# Altium PCB PCB_Modulo_22.PcbDoc
Units mm, origin at the board's own origin, x right, y up, seen from the top; angles counter-clockwise.
Board outline 80.01 x 60 mm, 2 copper layers (Top Layer, Bottom Layer); 30 components, 26 nets, 104 pads, 124 vias.
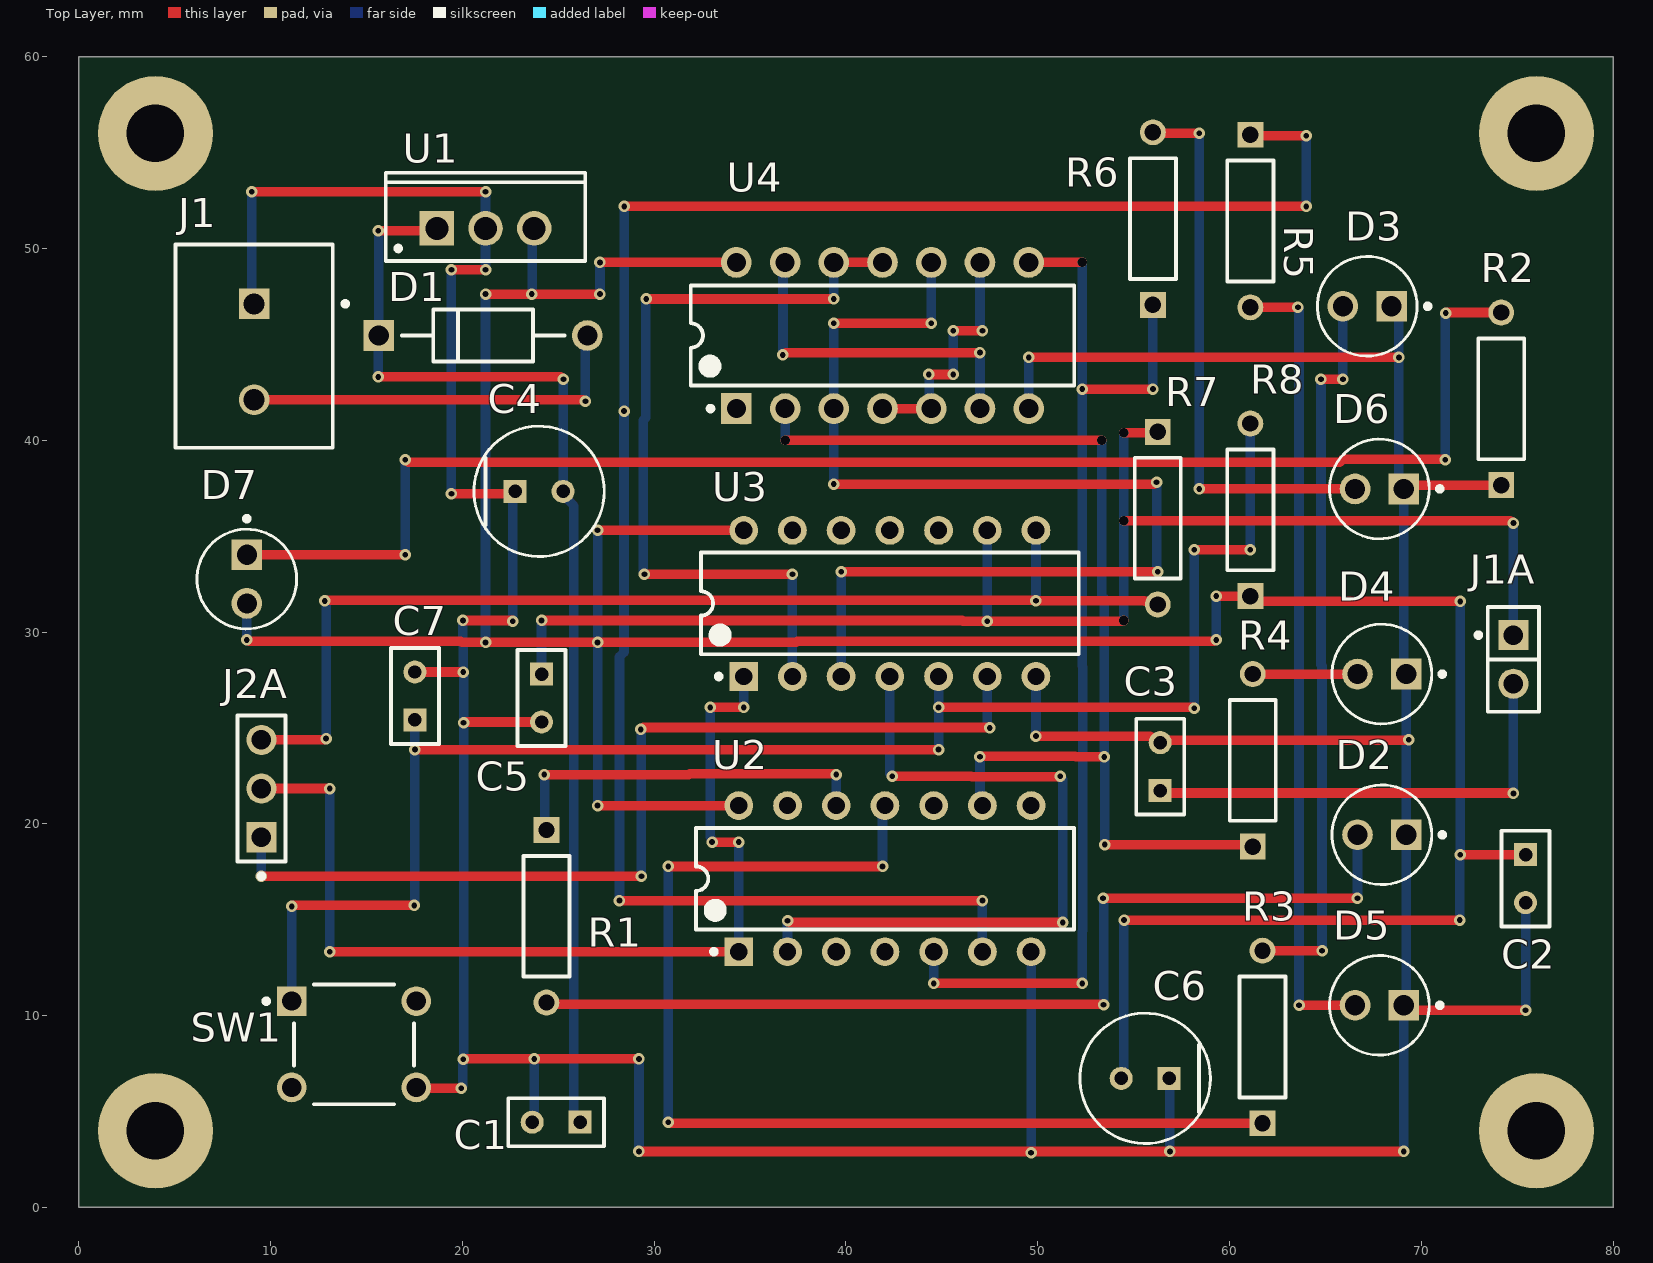
[diagram p0: Top Layer view]
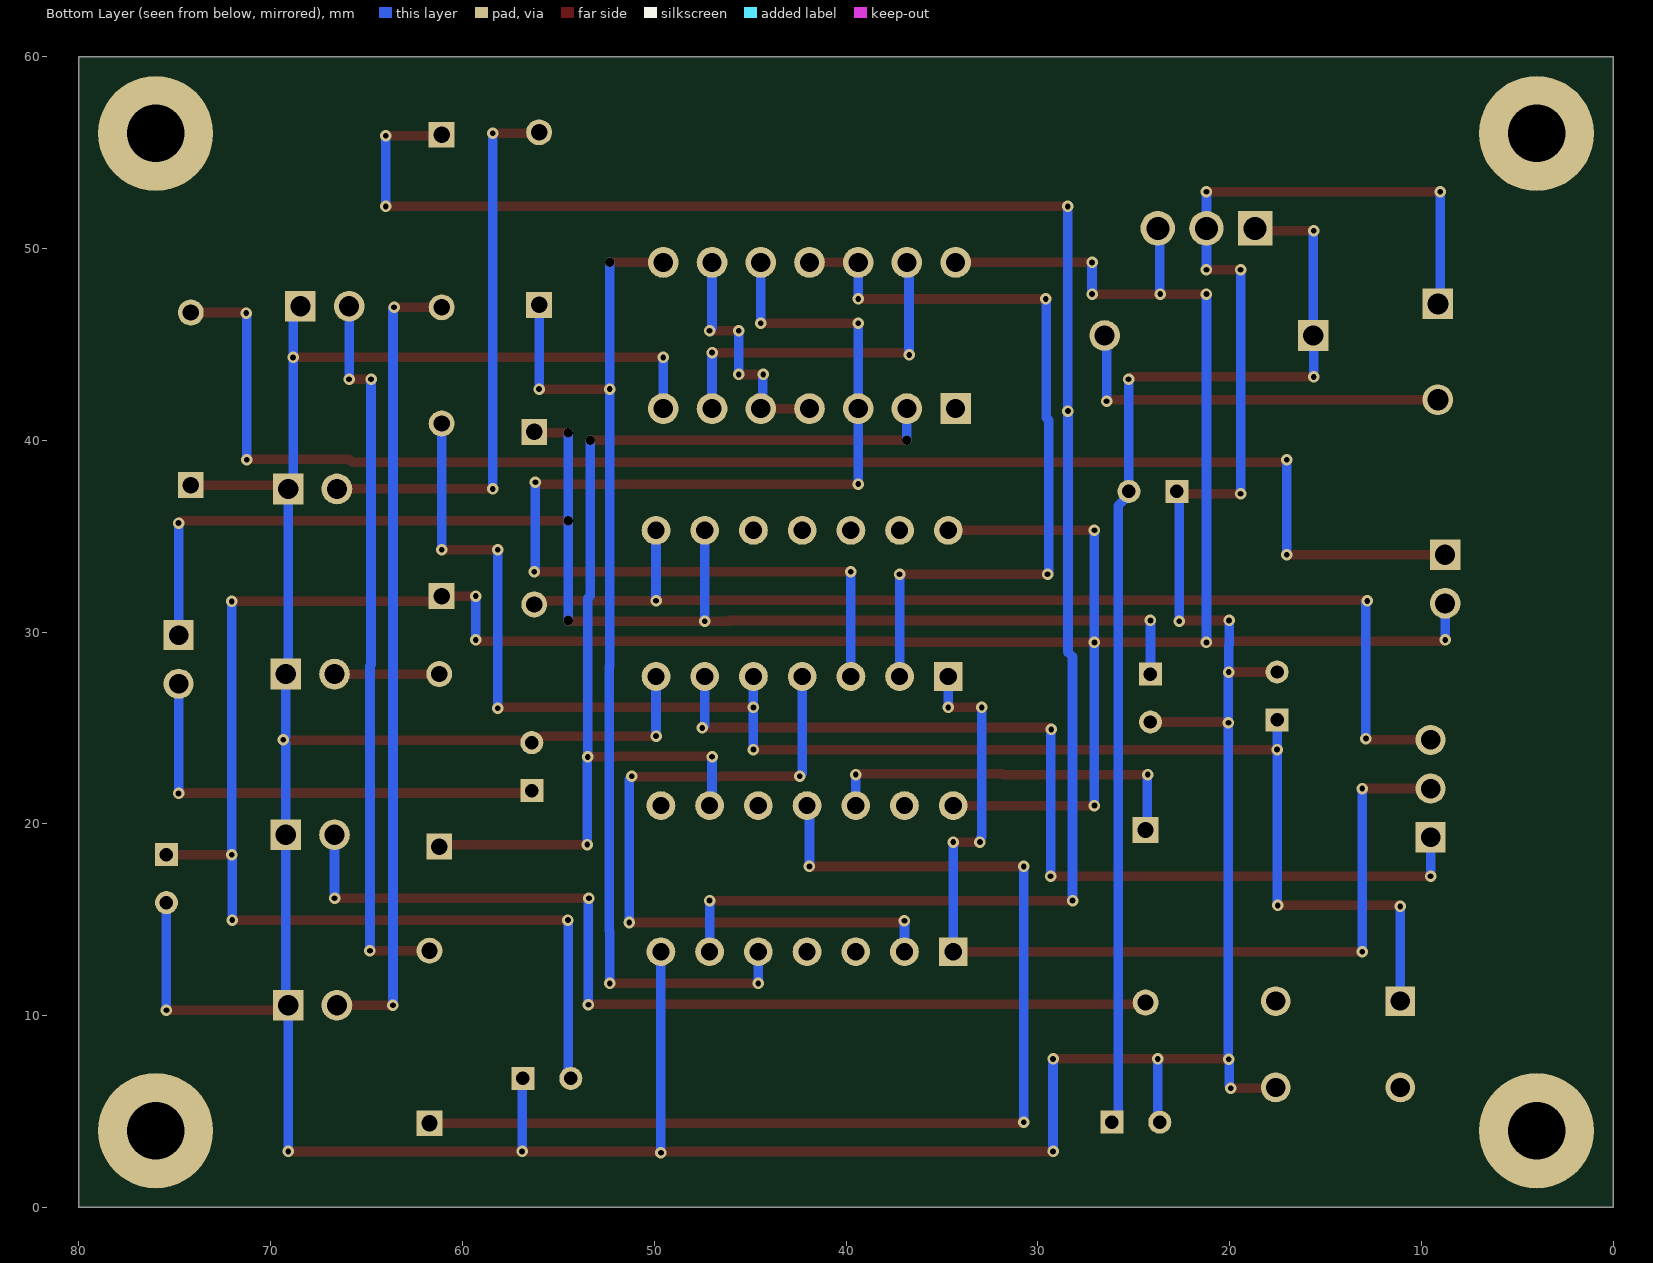
[diagram p1: Bottom Layer view, seen from below]
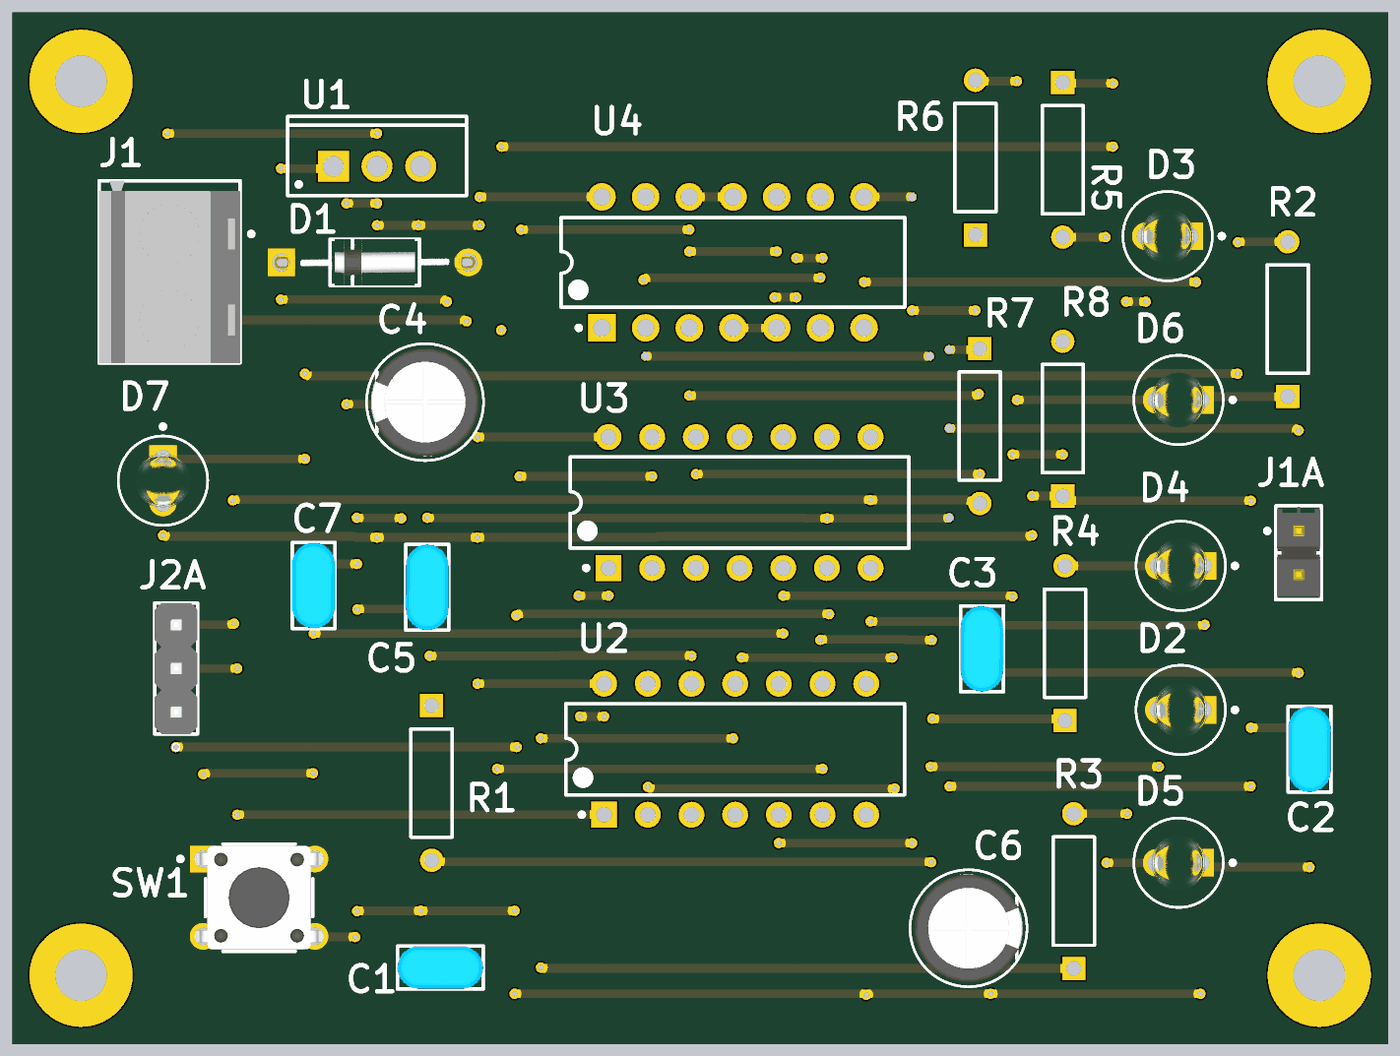
[diagram p2: 3D render of the assembled board from above, using the file's embedded part models]

## Layer stack, top to bottom
Top Solder: solder mask 0.0102, Solder Resist, Dk 3.5
Top Layer: signal copper 0.0356
Dielectric 1: dielectric 0.32, FR-4, Dk 4.8
Bottom Layer: signal copper 0.0356
Bottom Solder: solder mask 0.0102, Solder Resist, Dk 3.5

## Board outline
0,0 0,60 80,60 80.01,59.99 80.01,0.01 80,0

## Design rules (kind name [scope] priority, off if disabled: settings)
BoardOutlineClearance [All] p1 off: gap=1 ignorepadtopadclearanceinfootprint=FALSE
Clearance [All] p1: gap=0.5 ignorepadtopadclearanceinfootprint=FALSE
HoleSize [All] p1 off: absolutevalues=TRUE maxlimit=6 minlimit=0.6 maxpercent=80.000 minpercent=20.000
HoleToHoleClearance [All] p1 off: gap=0.254 allowstackedmicrovias=TRUE
MinimumAnnularRing [All] p1 off: minimumring=0.25
PolygonConnect [All] p1: connectstyle=Relief reliefconductorwidth=0.254 reliefentries=4 polygonreliefangle="90 Angle" airgapwidth=0.254
RoutingVias [All] p1: holewidth=0.3 width=0.6 viastyle="Through Hole" minholewidth=0.5 minwidth=0.3 maxholewidth=0.7 maxwidth=0.5
SolderMaskExpansion [All] p1: expansion=0.102 istentingtop=FALSE
SupplyNets "Schematic Supply Nets" [InNet('GND')] p1: voltage=0.000
Width [All] p1: maxlimit=0.5 minlimit=0.5 preferedwidth=0.5 minimp=50.000000 maximp=50.000000 favimp=50.000000
28 further rules are at their usual default settings.

## Components (designator, comment, footprint, x,y, rotation, side; value= is the part's Value field where it differs from the comment)
C1 "220nf" FP-RDE0P1-MFG 24.892,4.445 r180 top
C2 "220nf" FP-RDE0P1-MFG 75.438,17.145 r270 top
C3 "3.3uF" FP-RDE0P1-MFG 56.388,22.987 r90 top
C4 "100uf" FP-RAD-TH-D_6_3_0_5-L_11-MFG 24.003,37.338 r0 top
C5 "33p" FP-RDE0P1-MFG 24.13,26.563 r270 top
C6 "100uf" FP-RAD-TH-D_6_3_0_5-L_11-MFG 55.606,6.731 r180 top
C7 "220nf" FP-RDE0P1-MFG 17.526,26.67 r90 top
D1 "1N4001" FP-1N4001-E3-73-MFG 21.082,45.466 r0 top value=15pF
D2 "TLLG4400-AS12" FP-6_544-5255_01-4-MFG 67.945,19.431 r180 top
D3 "TLLG4400-AS12" FP-6_544-5255_01-4-MFG 67.183,46.99 r180 top
D4 "TLLG4400-AS12" FP-6_544-5255_01-4-MFG 67.945,27.813 r180 top
D5 "TLLG4400-AS12" FP-6_544-5255_01-4-MFG 67.818,10.541 r180 top
D6 "TLLG4400-AS12" FP-6_544-5255_01-4-MFG 67.818,37.465 r180 top
D7 "TLLG4400-AS12" FP-6_544-5255_01-4-MFG 8.763,32.766 r270 top
J1 "282836-2" TECO-282836-2_V 9.144,44.617 r270 top
J1A "TSW-102-14-G-S" FP-TSW-102-14-G-S-MFG 74.803,28.575 r270 top
J2A "PR20203VBNN" FP-PR20203VBNN-MFG 9.525,21.844 r90 top
R1 "1k" RESA60-630X240 24.384,15.185 r270 top
R2 "1k" RESA60-630X240 74.168,42.164 r90 top
R3 "1k" RESA60-630X240 61.722,8.89 r90 top
R4 "1k" RESA60-630X240 61.214,23.313 r90 top
R5 "1k" RESA60-630X240 61.087,51.435 r270 top
R6 "1k" RESA60-630X240 56.007,51.562 r90 top
R7 "100K" RESA60-630X240 56.261,35.941 r270 top
R8 "10K" RESA60-630X240 61.087,36.377 r90 top
SW1 "TL1105AF160Q" FP-TL1105AF160Q-MFG 14.351,8.509 r0 top
U1 "L7805CP" TO220FP 21.209,51.054 r0 top
U2 "CD4024BE" N0014A 42.037,17.145 r90 top
U3 "CD40106BE" N0014A 42.291,31.496 r90 top
U4 "CD4023BF" J0014A 41.91,45.466 r90 top

## Footprints (in the part's own frame and the unit in brackets; to place one, negate y for a bottom-side part, rotate by r counter-clockwise, add the part's x,y. Pads: shape width x height; smd on the part's side, far side on the other; paste and mask are expansions set on the pad)
FP-1N4001-E3-73-MFG [mm]
  rect 1.6x1.6 hole 1.05 paste-2539.97 mask+0: 1(-5.438,0)
  round 1.6 hole 1.05 paste-2539.97 mask+0: 2(5.438,0)
  silkscreen extent -4.24,-1.35 4.24,1.35, body extent -6.34,-1.45 6.34,1.45, height 0.25
FP-6_544-5255_01-4-MFG [mm]
  rect 1.6x1.6 hole 1.05 paste-2539.97 mask+0: 1(-1.27,0)
  round 1.6 hole 1.05 paste-2539.97 mask+0: 2(1.27,0)
  silkscreen extent -3.27,-2.6 2.6,2.6, body extent -2.32,-2.32 2.32,2.32, height 0.25
FP-PR20203VBNN-MFG [mm]
  rect 1.57x1.57 hole 1.02 paste-2539.97 mask+0: 1(-2.54,0)
  round 1.57 hole 1.02 paste-2539.97 mask+0: 2(0,0) 3(2.54,0)
  silkscreen extent -4.7,-1.25 3.81,1.25, body extent -3.91,-1.35 3.91,1.35, height 0.25
FP-RAD-TH-D_6_3_0_5-L_11-MFG [mm]
  rect 1.2x1.2 hole 0.7 paste-2539.97 mask+0: 1(-1.25,0)
  round 1.2 hole 0.7 paste-2539.97 mask+0: 2(1.25,0)
  silkscreen extent -3.4,-3.4 3.4,3.4, body extent -3.5,-3.5 3.5,3.5, height 0.25
FP-RDE0P1-MFG [mm]
  rect 1.2x1.2 hole 0.7 paste-2539.97 mask+0: 1(-1.25,0)
  round 1.2 hole 0.7 paste-2539.97 mask+0: 2(1.25,0)
  silkscreen extent -2.5,-1.25 2.5,1.25, body extent -2.6,-1.35 2.6,1.35, height 0.25
FP-TL1105AF160Q-MFG [mm]
  rect 1.55x1.55 hole 1 paste-2539.97 mask+0: 1(-3.25,2.25)
  round 1.55 hole 1 paste-2539.97 mask+0: 2(3.25,2.25) 3(-3.25,-2.25) 4(3.25,-2.25)
  silkscreen extent -4.7,-3.13 3.13,3.13, body extent -4.13,-3.22 4.13,3.22, height 0.25
FP-TSW-102-14-G-S-MFG [mm]
  rect 1.57x1.57 hole 1.02 paste-2539.97 mask+0: 1(-1.27,0)
  round 1.57 hole 1.02 paste-2539.97 mask+0: 2(1.27,0)
  silkscreen extent -2.73,-1.95 2.73,1.34, body extent -2.83,-1.44 2.83,1.44, height 0.25
J0014A [mm] "DIP, 14-Leads, Body 19.95x7.2mm, Pitch 2.54mm"
  rect 1.6x1.6 hole 1: 1(-3.81,7.62)
  round 1.6 hole 1: 2(-3.81,5.08) 3(-3.81,2.54) 4(-3.81,0) 5(-3.81,-2.54) 6(-3.81,-5.08) 7(-3.81,-7.62) 8(3.81,-7.62) 9(3.81,-5.08) 10(3.81,-2.54) 11(3.81,0) 12(3.81,2.54) 13(3.81,5.08) 14(3.81,7.62)
  silkscreen extent -3.93,-10 2.6,10, body extent -3.96,-9.97 3.96,9.97, height 5.08
N0014A [mm] "DIP, 14-Leads, Body 19.7x6.6mm, Pitch 2.54mm"
  rect 1.5x1.5 hole 0.9: 1(-3.81,7.62)
  round 1.5 hole 0.9: 2(-3.81,5.08) 3(-3.81,2.54) 4(-3.81,0) 5(-3.81,-2.54) 6(-3.81,-5.08) 7(-3.81,-7.62) 8(3.81,-7.62) 9(3.81,-5.08) 10(3.81,-2.54) 11(3.81,0) 12(3.81,2.54) 13(3.81,5.08) 14(3.81,7.62)
  silkscreen extent -3.93,-9.85 2.65,9.85, body extent -3.95,-9.85 3.95,9.85, height 5.08
RESA60-630X240 [mm] "Axial Resistor, 2-Leads, Dia 2.4mm, Body Length 6.3mm"
  rect 1.35x1.35 hole 0.85: 1(-4.5,0)
  round 1.35 hole 0.85: 2(4.5,0)
  silkscreen extent -3.15,-1.2 3.15,1.2, body extent -3.15,-1.2 3.15,1.2, height 2.4
TECO-282836-2_V [mm] "Female Header, Pitch 5mm, 1 x 2 Position, Height 10mm"
  rect 1.6x1.6 hole 1.1: 1(-2.5,0)
  round 1.6 hole 1.1: 2(2.5,0)
  silkscreen extent -5.6,-4.1 5,4.88, body extent -5.6,-4.1 5,4.1, height 10
TO220FP [mm] "TO, Thru-Hole, Vertical, Heatsink Mounted; 3 In-Line Leads; Pitch 2.54 mm"
  rect 1.8x1.8 hole 1.2: 1(-2.54,0)
  round 1.8 hole 1.2: 2(0,0) 3(2.54,0)
  silkscreen extent -5.2,-1.7 5.2,2.9, body extent -5.25,-1.75 5.25,2.95, height 20

## Part data
C1 C2 C3 C5 C7: library part CMP-06035-012212-1, "Ceramic Capacitor 5pF ±0.25pF 50V C0G Radial", Capacitance=5pF, Case/Package=Radial, Dielectric=C0G, Max Operating Temperature=125°C, Min Operating Temperature=-55°C, Package Quantity=500, Resistor Type=Ceramic, Voltage Rating=50V, Height=3.5mm, Height - Seated (Max)=0.236inch, Lead Diameter=0.5mm, Lead Pitch=0.098inch, Length=0.197inch, Mount="Through Hole", Packaging=Bulk, Termination=Radial, Voltage Rating (DC)=50V, Width=0.098inch
C4 C6: library part CMP-05427-000856-1, "Aluminum Electrolytic Capacitors (Radial Lead Type) 100uF ±20% 25V", Capacitance=100uF, Case/Package=Radial, ESR (Equivalent Series Resistance)=130mR, Max Operating Temperature=105°C, Min Operating Temperature=-40°C, Package Quantity=2000, Ripple Current=455mA, Tolerance=20%, Voltage Rating=25V, Diameter=6mm, Height - Seated (Max)=0.5inch, Impedance=130mR, Lead Diameter=0.5mm, Lead Pitch=5mm, Length=11mm, Life (Hours)=2000Hour, Mount="Through Hole", Packaging="Tape and Reel", Polarity=Polar, RoHS Compliant=Yes, Series=FM, Termination=Radial, Voltage Rating (DC)=25V
D1: library part CMP-02540-000001-1, "DIODE GEN PURP 50V 1A DO204AL", Capacitance=15pF, Forward Current=1A, Manufacturer=Vishay, Manufacturer Part Number=1N4001-E3/73, Max Junction Temp=+150°C, Max Repetitive Reverse Voltage=50V, Max Surge Forward Current=30A, Peak Reverse Current=5uA, Temperature="-50°C to +150°C", Temperature Range Low=-50°C, Automotive=No, Category=Diode, ComponentLink2Description=Datasheet, ComponentLink2URL=http://www.vishay.com/docs/88503/1n4001.pdf, Device Class L1="Discrete Semiconductors", Device Class L2=Diodes, Device Class L3="Rectifier Diodes", Digikey Description="DIODE GEN PURP 50V 1A DO204AL", Height=2.7mm, Ipc Land Pattern Name=DIOPA1088W105L520D270, Lead Free=Yes, Mouser Description="Rectifiers Vr/50V Io/1A", Octopart=https://octopart.com/1n4001-e3%2F73-vishay-42330130, Package=1N4001-E3/73, Reverse Voltage=50V, RoHS=TRUE, Temperature Range High=+150°C
D2 D3 D4 D5 D6 D7: library part CMP-02520-000017-1, "LED GREEN DIFFUSED T-1 T/H", Case/Package=T, Color=Green, Forward Current=7mA, Forward Voltage=2.4V, Max Operating Temperature=100°C, Min Operating Temperature=-40°C, Power Dissipation=20mW, Reverse Voltage=20V, Test Current=2mA, Depth=3.2mm, Dominant Wavelength=575nm, Length=3.2mm, Lens Style=Diffused, Luminous Intensity=2mcd, Mount="Through Hole", Number of Elements=1, Number of LEDs=1, Number of Pins=2, Packaging="Tape and Reel", Radiation Hardening=No, RoHS Compliant=No, Viewing Angle=50°
J1: library part CMP-1684-00017-1, "Female Header, Pitch 5 mm, 1 x 2 Position, Height 10 mm, Tail Length 3.5 mm, Rohs, Bulk", Color=Green, Current=13.5A, Manufacturer="TE Connectivity", Package Description="Female Header, Pitch 5 mm, 1 x 2 Position, Height 10 mm, Tail Length 3.5 mm", Package Reference=THD, Standard Package=300, Voltage=300V, 3D Model=282836-2.pdf, Category=Connectors,Interconnects, Clamp Material - Plating=Brass-NickelPlated, Contact Material - Plating=Brass-TinPlated, Datasheet URL=http://www.te.com.cn/commerce/DocumentDelivery/DDEController?Action=showdoc&DocId=Catalog+Section%7F1308389_EUROSTYLE_TERMINAL_BLOCKS%7F0607%7Fpdf%7FEnglish%7FENG_CS_1308389_EUROSTYLE_TERMINAL_BLOCKS_0607.pdf%7F282836-2, Dynamic Catalog=BuchananSeries, Family=TerminalBlocks-WiretoBoard, Featured Product=EurostyleTerminalBlockConnectors, Features=Interlocking(Side), Housing Material=Polyamide(PA66),Nylon6/6, Manufacturer URL=http://www.te.com, Mating Orientation=HorizontalwithBoard, Mounting Type=ThroughHole, Number of Levels=1, Other Names="5ULV-02B / A98076", Packaging=Bulk, Pitch="0.197\"(5.00mm)", Positions Per Level=2, Product Training Modules=Wire-to-BoardEurostyleTerminalBlocks, RoHS Information=282836-2StatementofCompliance, Screw Material - Plating=Brass-NickelPlated, Screw Thread=M3, Series=Buchanan, Torque - Screw=0.68Nm(6Lb-In), Wire Gauge=16-30AWG, Wire Termination=Screw-RisingCageClamp
J1A: library part CMP-02766-001740-1, "CONN HEADER VERT 2POS 2.54MM", Color=Black, Flammability Rating="UL94 V-0", Max Current Rating=7.6A, Max Operating Temperature=125°C, Max Voltage Rating (AC)=550V, Min Operating Temperature=-55°C, Package Quantity=1, Connector Type=Header, Contact Finish - Mating=GOLD, Contact Material=Bronze, Contact Mating Length=0.32inch, Contact Plating=Gold, Contact Shape=Square, Contact Type="Male Pin", Depth=2.54mm, Fastening Type=Pull, Gender=Male, Housing Color=Black, Housing Material=Polyester, Insulation Color=Black, Insulation Material=PBT, Lead Free="Lead Free", Length=5.08mm, Mount="Through Hole", Number of Contacts=2, Number of Positions=2, Number of Rows=1, Orientation=Straight, Packaging=Bulk, Pitch=2.54mm, Radiation Hardening=No, REACH SVHC="No SVHC", RoHS Compliant=Yes, Series=TSW, Termination=Solder, Width=2.54mm
J2A: library part CMP-77940-000002-1, "CONN HEADER VERT 3POS 2.54MM", Current Rating=3A, Manufacturer="Metz Connect", Temperature="-40°C to +105°C", Temperature Range High=+105°C, Temperature Range Low=-40°C, Automotive=No, Category=Conn, ComponentLink2Description=Datasheet, ComponentLink2URL=https://datasheet.octopart.com/PR20203VBNN-Metz-Connect-datasheet-101610322.pdf, Conn Gender=Male, Conn Orientation=Straight, Contact Material=Gold,Nickel, Device Class L1=Connectors, Device Class L2="Headers and Wire Housings", Device Class L3=unset, Digikey Description="CONN HEADER VERT 3POS 2.54MM", Height=8.6mm, Lead Free=Yes, Manufacturer Part Number=PR20203VBNN, Number of Contacts=3, Number of Rows=1, Octopart=https://octopart.com/pr20203vbnn-metz+connect-87667116, Package=PR20203VBNN, Pitch=2.54mm, RoHS=TRUE
R1 R2 R3 R4 R5 R6 R7 R8: library part CMP-1659-00075-1, "Axial Resistor, 1 KOhm, +/- 1%, 250 mW, -55 to 155 degC, 2-Pin THD, RoHS, Bulk", Case\Package=Axial, Max Operating Temperature="155 degC", Min Operating Temperature="-55 degC", Package Quantity=200, Power Rating="250 mW", Resistance="10 kohm", Tolerance=1%, Voltage Rating="250 V", ComponentLink1Description="Manufacturer URL", ComponentLink1URL=http://www.yageo.com/, ComponentLink2Description=Datasheet, ComponentLink2URL=http://www.yageo.com/documents/recent/Yageo%20LR_MFR_2013.pdf, DatasheetVersion=Apr-13, Length="0.248 inch", PackageDescription="2-Pin Axial Lead, Dia 2.4 mm, Body Length 6.3 mm", PackageReference=MFR-25, Packaging=Bulk, RoHSCompliant=true
SW1: library part CMP-17879-000016-1, "SWITCH TACTILE SPST-NO 0.05A 12V", Color=Black, Contact Current Rating=50mA, Contact Resistance=100mR, Max Operating Temperature=70°C, Max Voltage Rating (DC)=50V, Min Operating Temperature=-20°C, Operating Force=160gf, Package Quantity=750, Voltage Rating (DC)=12V, Actuator Length=1.4mm, Actuator Material=Nylon, Actuator Type=Standard, Contact Material=Bronze, Contact Plating=Silver, Current Rating=50mA, Electrical Life=100000Cycles, Housing Material=Nylon, Illumination Type=Non-Illuminated, Lead Free="Lead Free", Length=6mm, Mechanical Life=100000Cycles, Mount="Through Hole", Orientation=Straight, Packaging=Bulk, Reach SVHC Compliant=Yes, RoHS Compliant=Yes, Series=TL1105, Size=6mm, Switch Function=Off-Mom, Switch Travel=0.25mm, Termination="PC Pin", Throw Configuration=SPST, Width=6mm
U1: library part CMP-0244-00474-1, "Positive Voltage Regulator, 5V, 3-Pin TO-220FP", ComponentLink1Description="Manufacturer URL", ComponentLink1URL=http://www.st.com, ComponentLink2Description=Datasheet, ComponentLink2URL=http://www.st.com/internet/com/TECHNICAL_RESOURCES/TECHNICAL_LITERATURE/DATASHEET/CD00000444.pdf, DatasheetVersion=16/11/2011, PackageDescription="TO, Thru-Hole, Vertical, Heatsink Mounted; 3 In-Line Leads; Pitch 2.54 mm", PackageReference=TO220FP, PackageVersion=2011
U2: library part CMP-1623-00482-2, "CMOS 7-Stage Ripple-Carry Binary Counter/Divider, N0014A, TUBE", F @ Nom Voltage(Max)(Mhz)=8, Generic Part Number=CD4024B, ICC @ Nom Voltage(Max)(mA)=0.03, Manufacturer="Texas Instruments", Operating Temperature Range(C)="-55 to 125", Rating=Military, tpd @ Nom Voltage(Max)(ns)=160, Voltage(Nom)(V)=10, Bits(#)=12, Code_JEDEC=MS-001, DatasheetVersion=SCHS030D, Function=Counter, Input Type=CMOS, Inputs=1, Output Drive (IOL/IOH)(Max)(mA)=1.5/-1.5, Output Type=CMOS, PackageReference=N0014A, Schmitt Trigger=No, Technology Family=CD4000, Type=Binary, VCC(Max)(V)=18, VCC(Min)(V)=3
U3: library part CMP-1615-00909-3, "CMOS Hex Schmitt Triggers, N0014A, TUBE", F @ Nom Voltage(Max)(Mhz)=12, Generic Part Number=CD40106B, ICC @ Nom Voltage(Max)(mA)=0.03, Manufacturer="Texas Instruments", Operating Temperature Range(C)="-55 to 125", Rating=Catalog, tpd @ Nom Voltage(Max)(ns)=280, Voltage(Nom)(V)=5, Bits(#)=6, Code_JEDEC=MS-001, DatasheetVersion=SCHS097D, Input Type=CMOS, Output Drive (IOL/IOH)(Max)(mA)=-1/1, Output Type=CMOS, PackageReference=N0014A, Schmitt Trigger=Yes, Technology Family=CD4000, VCC(Max)(V)=18, VCC(Min)(V)=3
U4: library part CMP-1627-00322-2, "CMOS Triple 3-Input NAND Gate, J0014A, TUBE", F @ Nom Voltage(Max)(Mhz)=8, Generic Part Number=CD4023B, ICC @ Nom Voltage(Max)(mA)=0.015, Manufacturer="Texas Instruments", Operating Temperature Range(C)="-55 to 125", Rating=Military, Voltage(Nom)(V)=10, Bits(#)=3, DatasheetVersion=SCHS021D, Input Type=CMOS, Output Drive (IOL/IOH)(Max)(mA)=1.5/-1.5, Output Type=CMOS, PackageReference=J0014A, Schmitt Trigger=No, Technology Family=CD4000, VCC(Max)(V)=18, VCC(Min)(V)=3

## Free pads (board coordinates)
  round 6 hole 3: 1(4,4) 2(76,4) 3(76,56) 4(4,56)

## Via types
v1: diameter 0.6, hole 0.3, Top Layer to Bottom Layer, 118 vias
v2: diameter 0.5, hole 0.5, Top Layer to Bottom Layer, 6 vias

## Nets (pads, with @x,y where several pads share a name; then routed paths per layer and width w, separated by ;. In a path a pad name is that pad's centre, name@x,y a point inside that pad or via, vN(x,y) a via of type N, cw(c..) or ccw(c..) an arc to the next point about the centre after c; other vN are vias at no path point)
5V: C2.1 C6.2 D7.2 R8.1 U1.3 U2.14 U3.14 U4.14 | length 179.2
  Top Layer w0.5: v1(8.763,29.591) 8.79,29.591 8.858,29.523 19.909,29.523 19.968,29.464 37.417,29.464 37.476,29.523 59.214,29.523 59.282,29.591 v1(59.309,29.591) ; v1(21.209,47.625) v1(27.178,47.625) ; v1(27.051,20.955) U2.14 ; v1(27.051,35.306) U3.14 ; v1(27.178,49.276) U4.14 ; v1(54.501,14.986) v1(72.009,14.986) ; v1(59.309,31.877) R8.1 61.361,31.603 v1(72.029,31.603) ; v1(72.029,18.395) C2.1
  Bottom Layer w0.5: v1(8.763,29.591) D7.2 ; v1@21.209,29.491 v1(21.209,47.625) ; v1(23.622,47.625) 23.641,47.644 23.641,50.946 U1.3 ; v1(27.051,20.955) v1(27.051,35.306) ; v1(27.178,47.625) v1(27.178,49.276) ; C6.2 54.482,6.857 54.482,14.967 v1(54.501,14.986) ; v1(59.309,29.591) v1(59.309,31.877) ; v1(72.009,14.986) 72.009,18.375 v1(72.029,18.395) v1(72.029,31.603)
  other v1: 21.209,29.464 27.051,29.464
CLK: J2A.2 U2.1 U3.1 | length 51
  Top Layer w0.5: J2A.2 9.652,21.971 9.779,21.844 v1(13.081,21.844) ; v1(13.081,13.335) U2.1 ; v1(32.927,26.074) v1(34.671,26.074) ; v1(33.02,19.05) v1(34.417,19.05)
  Bottom Layer w0.5: v1(13.081,13.335) v1(13.081,21.844) ; v1(32.927,26.074) 32.927,22.171 32.917,22.161 32.917,19.307 33.001,19.223 33.001,19.069 v1(33.02,19.05) ; U2.1 v1(34.417,19.05) ; v1(34.671,26.074) U3.1
GND: C1.2 C2.2 C3.2 C4.1 C5.2 C6.1 C7.2 D2.1 D3.1 D4.1 D5.1 D6.1 J1.1 R2.1 SW1.4 U1.2 U2.7 U3.7 U4.7 | length 260.6
  Top Layer w0.5: v1(9.017,52.959) v1(21.209,52.959) ; C7.2 v1(20.046,27.92) ; SW1.4 17.637,6.223 v1(19.939,6.223) ; v1(19.431,37.211) 22.626,37.211 C4.1 ; v1(19.431,48.895) v1(21.209,48.895) ; v1(20.032,30.607) 22.565,30.607 22.58,30.592 v1@22.593,30.606 ; v1@20.066,7.747 v1(23.749,7.747) v1(29.21,7.747) ; v1(20.066,25.273) 20.106,25.313 C5.2 ; U1.2@21.209,51.308 U1.2@21.209,51.629 ; v1(29.21,2.921) 49.593,2.921 v1(49.657,2.857) 49.721,2.921 v1(69.088,2.921) ; v1(49.53,44.323) v1(68.834,44.323) ; v1(49.911,24.579) 55.857,24.579 56.326,24.11 56.45,24.11 56.705,24.365 69.323,24.365 v1(69.342,24.384) ; D6.1@68.834,37.465 D6.1@69.033,37.664 ; D6.1@68.906,37.664 R2.1 ; D5.1 69.342,10.287 v1(75.438,10.287)
  Bottom Layer w0.5: v1(9.017,52.959) 9.017,47.244 J1.1 ; v1(19.431,37.211) v1(19.431,48.895) ; v1(19.939,6.223) 20.03,6.314 20.03,7.711 20.066,7.747 v1(20.066,25.273) 20.066,27.9 v1(20.046,27.92) 20.056,27.93 20.056,29.307 20.032,29.331 v1(20.032,30.607) ; v1(21.209,48.895) U1.2 v1(21.209,52.959) ; v1(22.626,30.573) 22.626,37.338 C4.1@22.715,37.427 ; C1.2 23.749,4.552 v1(23.749,7.747) ; v1(29.21,2.921) v1(29.21,7.747) ; U4.7 v1(49.53,44.323) ; v1(49.657,2.857) U2.7 ; v1(49.911,24.579) U3.7 ; C6.1 56.896,6.691 v1(56.896,2.921) ; D3.1@68.58,46.99 68.834,46.736 v1(68.834,44.323) 68.834,37.719 D6.1 69.088,27.94 D4.1 69.215,24.538 69.342,24.411 69.342,24.357 69.215,24.23 69.215,10.668 D5.1 v1(69.088,2.921) ; v1(75.438,10.287) C2.2
  other v1: 20.048,7.729
NetC1_1: C1.1 C4.2 D1.1 U1.1 | length 59.6
  Top Layer w0.5: v1(15.621,43.307) 25.119,43.307 25.246,43.18 v1(25.273,43.18) ; v1(15.621,50.927) 18.542,50.927 U1.1
  Bottom Layer w0.5: v1(15.621,43.307) 15.621,45.443 D1.1 15.644,50.904 v1(15.621,50.927) ; v1(25.273,43.18) 25.263,43.17 25.263,37.348 C4.2 25.253,37.149 25.809,36.593 25.809,4.778 C1.1
NetC3_1: C3.1 J1A.2 | length 24.1
  Top Layer w0.5: C3.1@56.388,21.61 74.783,21.61 v1(74.803,21.59)
  Bottom Layer w0.5: v1(74.803,21.59) J1A.2
NetC5_1: C5.1 J1A.1 R7.1 U3.9 | length 75.7
  Top Layer w0.5: v1(24.13,30.607) 46.071,30.607 46.105,30.573 v1(47.371,30.573) ; v1@47.387,30.591 47.405,30.573 54.449,30.573 v2(54.483,30.607) ; v2(54.483,35.814) 74.649,35.814 74.776,35.687 v1(74.803,35.687) ; v2(54.483,40.386) 56.206,40.386 R7.1
  Bottom Layer w0.5: C5.1 v1(24.13,30.607) ; v1(47.371,30.573) U3.9 ; v2(54.483,30.607) v2(54.483,40.386) ; J1A.1 v1(74.803,35.687)
NetC7_1: C7.1 R8.2 SW1.1 U3.5 | length 83.5
  Top Layer w0.5: v1(11.101,15.696) 11.153,15.748 v1(17.491,15.748) ; v1(17.526,23.876) v1(44.831,23.876) ; v1@44.858,26.074 58.1,26.074 58.139,26.035 v1(58.166,26.035) ; v1(58.166,34.29) v1(61.087,34.29)
  Bottom Layer w0.5: SW1.1 v1(11.101,15.696) ; v1(17.491,15.748) 17.526,15.783 C7.1@17.526,25.694 ; v1(44.831,23.876) U3.5 ; v1(58.166,26.035) v1(58.166,34.29) ; v1(61.087,34.29) R8.2
  other v1: 44.831,26.074
NetD1_2: D1.2 J1.2 | length 20.8
  Top Layer w0.5: J1.2 26.309,42.117 26.389,42.037 v1(26.416,42.037) ; D1.2@26.478,45.508 D1.2
  Bottom Layer w0.5: v1(26.416,42.037) 26.416,45.362 D1.2
NetD2_2: D2.2 R1.2 | length 51.2
  Top Layer w0.5: R1.2 24.474,10.595 53.413,10.595 v1(53.432,10.576) ; v1(53.408,16.129) v1(66.675,16.129)
  Bottom Layer w0.5: v1(53.408,16.129) 53.427,16.11 53.427,16.042 53.451,16.018 53.451,10.595 v1(53.432,10.576) ; v1(66.675,16.129) D2.2
NetD3_2: D3.2 R3.2 | length 37.9
  Top Layer w0.5: R3.2 v1(64.825,13.39) ; v1(64.77,43.18) v1(65.913,43.18)
  Bottom Layer w0.5: v1(64.77,43.18) 64.77,28.303 64.825,28.248 v1(64.825,13.39) ; v1(65.913,43.18) D3.2
NetD4_2: D4.2 R4.2 | length 5.5
  Top Layer w0.5: R4.2 D4.2
NetD5_2: D5.2 R5.2 | length 42.1
  Top Layer w0.5: R5.2 v1(63.572,46.935) ; v1(63.627,10.541) D5.2
  Bottom Layer w0.5: v1(63.572,46.935) 63.627,46.88 v1(63.627,10.541) ; D5.2@66.353,10.736 D5.2
NetD6_2: D6.2 R6.2 | length 29.1
  Top Layer w0.5: R6.2 56.062,56.007 v1(58.42,56.007) ; v1(58.42,37.465) D6.2
  Bottom Layer w0.5: v1(58.42,37.465) v1(58.42,56.007)
NetD7_1: D7.1 R2.2 | length 78.1
  Top Layer w0.5: D7.1 v1(17.018,34.036) ; v1(17.018,38.989) 17.045,38.989 17.172,38.862 65.753,38.862 65.906,39.015 70.199,39.015 70.206,39.008 71.228,39.008 v1(71.247,38.989) ; v1(71.275,46.637) 71.302,46.664 R2.2
  Bottom Layer w0.5: v1(17.018,34.036) v1(17.018,38.989) ; v1(71.247,38.989) 71.261,39.003 71.261,46.623 v1(71.275,46.637)
NetJ2A_1: J2A.1 U3.6 | length 50.4
  Top Layer w0.5: v1(9.525,17.272) v1(29.337,17.272) ; v1(29.303,24.926) 29.33,24.926 29.428,25.024 47.45,25.024 47.452,25.022 47.474,25.022 v1@47.477,25.024
  Bottom Layer w0.5: v1(9.525,17.272) J2A.1 ; v1@29.336,24.893 29.322,24.88 29.337,24.865 v1(29.337,17.272) ; U3.6 47.371,25.13 v1(47.498,25.003)
NetJ2A_3: J2A.3 R7.2 U3.8 | length 57.8
  Top Layer w0.5: J2A.3 12.827,24.384 v1(12.895,24.452) ; v1(12.827,31.623) 12.854,31.623 12.888,31.657 49.895,31.657 v1(49.911,31.641) 55.543,31.641 55.58,31.604 56.098,31.604 R7.2
  Bottom Layer w0.5: v1(12.827,31.623) 12.827,31.596 12.895,31.528 v1(12.895,24.452) ; v1(49.911,31.641) U3.8
NetR1_1: R1.1 U2.12 | length 19.6
  Top Layer w0.5: v1(24.273,22.572) 31.816,22.572 31.85,22.606 39.436,22.606 39.47,22.572 v1(39.497,22.572)
  Bottom Layer w0.5: v1(24.273,22.572) 24.292,22.553 24.292,19.959 R1.1@24.384,19.867 ; U2.12 v1(39.497,22.572)
NetR3_1: R3.1 U2.11 | length 58.8
  Top Layer w0.5: v1(30.734,4.445) 30.789,4.39 R3.1 ; v1(30.734,17.78) v1(41.91,17.78)
  Bottom Layer w0.5: v1(30.734,4.445) v1@30.734,17.807 ; v1(41.91,17.78) 41.91,20.828 U2.11
NetR4_1: R4.1 U2.9 U4.2 | length 56.2
  Top Layer w0.5: v2(36.83,40.005) v2(53.34,40.005) ; v1(46.99,23.505) 47.017,23.505 47.041,23.529 51.949,23.529 51.983,23.495 v1(53.467,23.495) ; v1(53.501,18.923) 53.52,18.904 61.123,18.904 R4.1
  Bottom Layer w0.5: v2(36.83,40.005) U4.2 ; v1(46.99,23.505) 46.99,21.082 U2.9 ; v2(53.34,40.005) 53.34,31.891 53.467,31.764 v1(53.467,23.495) 53.486,23.476 53.486,23.195 53.501,23.18 v1(53.501,18.923)
NetR5_1: R5.1 U2.6 | length 100.1
  Top Layer w0.5: v1(28.194,16.002) v1(47.117,16.002) ; v1(28.431,41.529) v1@28.458,41.529 ; v1(28.448,52.197) v1(64.008,52.197) ; R5.1 61.142,55.88 v1(64.008,55.88)
  Bottom Layer w0.5: v1(28.194,16.002) 28.194,28.715 28.431,28.952 v1(28.431,41.529) ; v1@28.44,41.537 28.44,52.189 v1(28.448,52.197) ; U2.6 v1(47.117,16.002) ; v1(64.008,52.197) v1(64.008,55.88)
NetR6_1: R6.1 U2.5 U4.8 | length 57.9
  Top Layer w0.5: v1(44.577,11.685) v1(52.324,11.684) ; U4.8 v2(52.324,49.276) ; v1(52.324,42.672) v1(56.007,42.672)
  Bottom Layer w0.5: v1(44.577,11.685) U2.5 ; v1(52.324,11.684) 52.324,14.39 52.358,14.424 52.358,28.194 52.324,28.228 v2(52.324,49.276) ; v1(56.007,42.672) R6.1
NetU3_2: U3.2 U4.11 U4.12 | length 41.7
  Top Layer w0.5: v1(29.498,33.02) v1(37.211,33.02) ; v1(29.591,47.371) v1(39.37,47.371) ; U4.12 U4.11
  Bottom Layer w0.5: v1(29.498,33.02) 29.498,33.047 29.431,33.114 29.431,41.044 29.572,41.185 29.572,47.352 v1(29.591,47.371) ; U3.2 v1(37.211,33.02) ; v1(39.37,47.371) U4.12
NetU3_3: U3.3 U4.3 U4.10 | length 60.3
  Top Layer w0.5: v1(39.37,37.719) 56.077,37.719 56.17,37.812 v1(56.197,37.812) ; v1(39.37,46.101) v1(44.45,46.101) ; v1(39.751,33.147) v1(56.261,33.147) ; U4.10@44.386,49.212 U4.10
  Bottom Layer w0.5: v1(39.37,37.719) v1(39.37,46.101) ; U3.3 v1(39.751,33.147) ; v1(44.45,46.101) U4.10 ; v1(56.197,37.812) 56.197,33.238 56.261,33.174 v1(56.261,33.147)
NetU4_4: U4.4 U4.5 U4.9 | length 13.1
  Top Layer w0.5: U4.4 U4.5 ; v1(44.323,43.434) v1(45.593,43.434) ; v1(45.593,45.72) v1(47.117,45.72)
  Bottom Layer w0.5: v1(44.323,43.434) 44.342,43.415 44.342,41.764 U4.5 ; v1(45.593,43.434) v1(45.593,45.72) ; U4.9 46.99,45.874 47.117,45.747 v1(47.117,45.72)
NetU4_6: U4.6 U4.13 | length 18.1
  Top Layer w0.5: v1(36.703,44.45) 36.73,44.45 36.857,44.577 v1(46.99,44.577)
  Bottom Layer w0.5: v1(36.703,44.45) 36.722,44.469 36.722,49.168 U4.13 ; U4.6 v1(46.99,44.577)
RESET: U2.2 U3.4 | length 37.7
  Top Layer w0.5: v1(36.957,14.952) 36.984,14.952 37.077,14.859 v1(51.308,14.859) ; v1(42.418,22.479) 46.531,22.479 46.555,22.455 51.086,22.455 51.091,22.46 51.162,22.46 v1(51.181,22.479)
  Bottom Layer w0.5: U2.2 v1(36.957,14.952) ; U3.4 42.291,22.606 v1(42.418,22.479) ; v1(51.181,22.479) 51.181,22.452 51.308,22.325 v1(51.308,14.859)
pads on no net: SW1.2 SW1.3 U2.3 U2.4 U2.8 U2.10 U2.13 U3.10 U3.11 U3.12 U3.13 U4.1

## Other copper
Top Layer:

## Silkscreen, mask and mechanical layers (free items; w line width, h text height)
Mechanical 1:
  lines w0.3: 80,0 0,0 0,60 80,60 80.01,59.99 80.01,0.01